# Altium PCB FourKeysKeyboard.PcbDoc
Units mil, origin at the board's own origin, x right, y up, seen from the top; angles counter-clockwise.
Board outline 3569.6 x 1821.05 mil, 2 copper layers (Top Layer, Bottom Layer); 9 components, 5 nets, 72 pads, 88 vias.
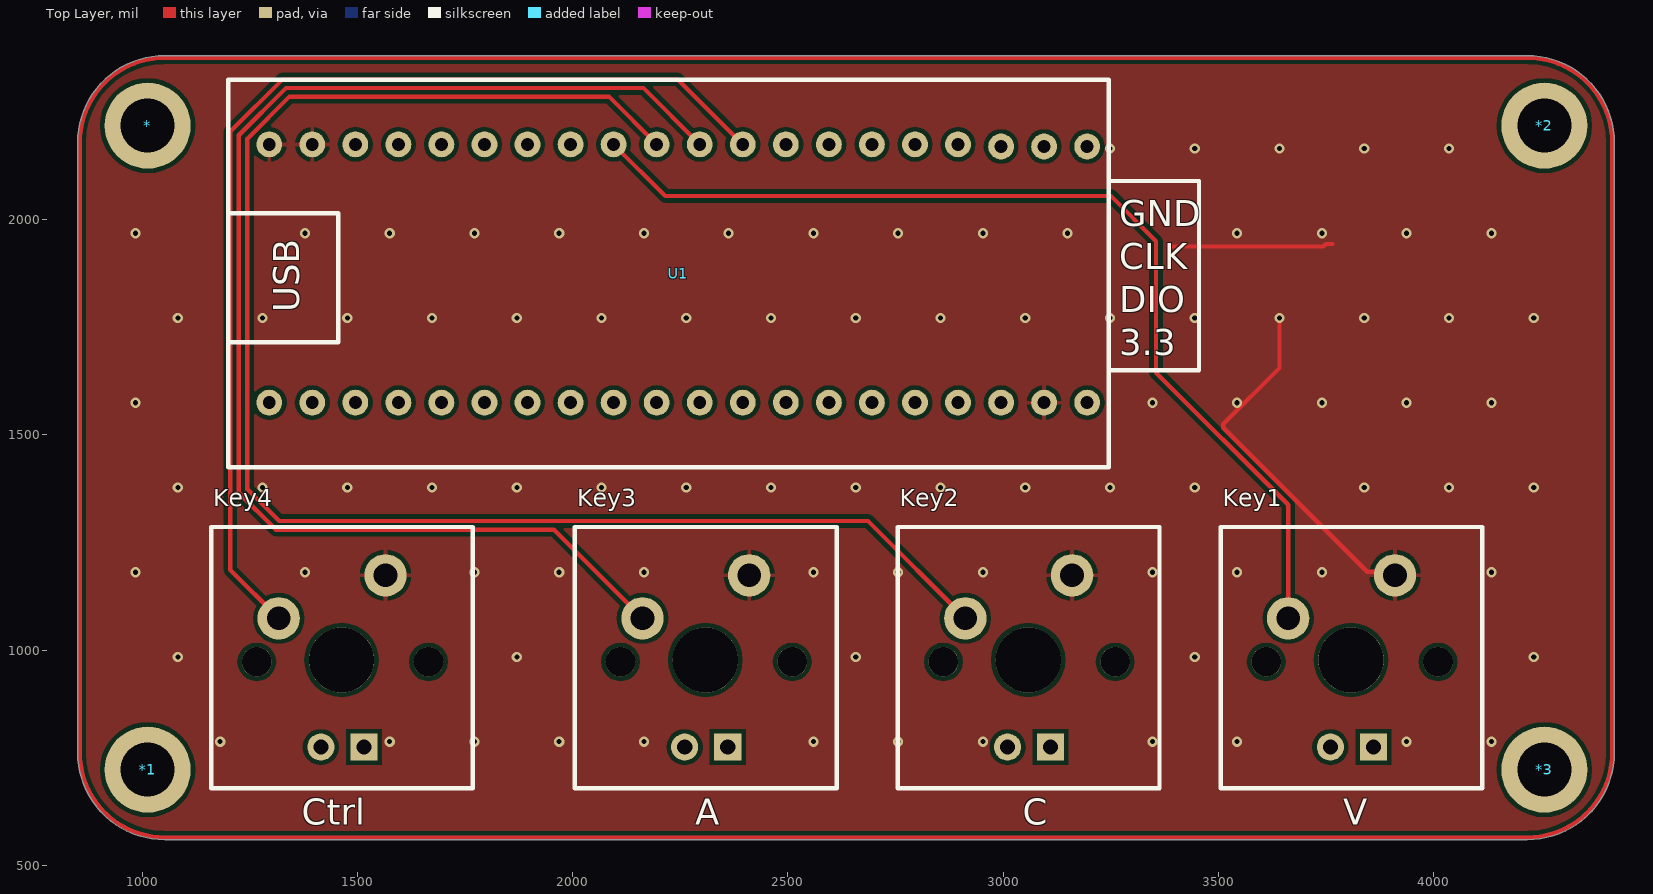
[diagram p0: Top Layer view]
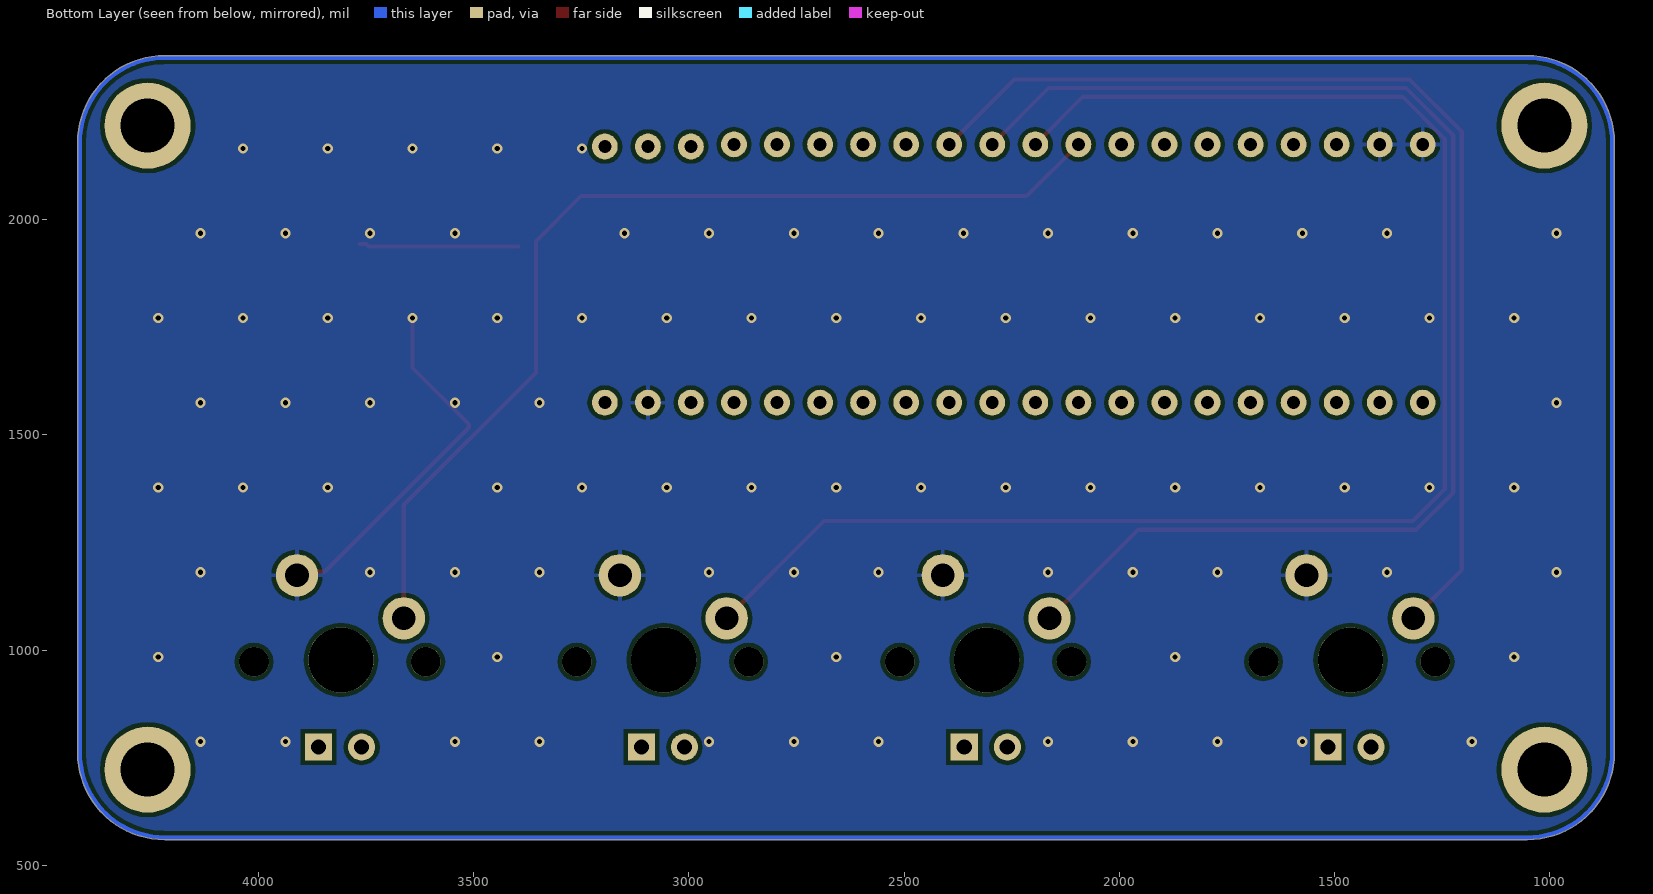
[diagram p1: Bottom Layer view, seen from below]

## Layer stack, top to bottom
Top Solder: solder mask 0.4, Solder Resist, Dk 3.5
Top Layer: signal copper 1.4
Dielectric 1: dielectric 12.6, FR-4, Dk 4.8
Bottom Layer: signal copper 1.4
Bottom Solder: solder mask 0.4, Solder Resist, Dk 3.5

## Board outline
849.99,761.85 849.99,2179.17 849.98,2179.17 cw(c1051.85,2179.17) 1051.85,2381.04 4217.72,2381.04 cw(c4217.72,2179.17) 4419.58,2179.17 4419.58,761.85 cw(c4217.72,761.85) 4217.72,559.99 1051.85,559.99 cw(c1051.85,761.85)

## Design rules (kind name [scope] priority, off if disabled: settings)
Clearance [All] p1: gap=10 ignorepadtopadclearanceinfootprint=FALSE except(0: Arc-Hole Track-Hole SMDPad-Hole THPad-Hole Via-Hole Fill-Hole Poly-Hole Region-Hole Text-Hole)
PolygonConnect [All] p1: connectstyle=Relief reliefconductorwidth=10 reliefentries=4 polygonreliefangle="90 Angle" airgapwidth=10
RoutingVias [All] p1: holewidth=28 width=50 viastyle="Through Hole" minholewidth=28 minwidth=50 maxholewidth=28 maxwidth=50
SolderMaskExpansion [All] p1: expansion=4
Width [All] p1: maxlimit=10 minlimit=10 preferedwidth=10
30 further rules are at their usual default settings.

## Components (designator, comment, footprint, x,y, rotation, side; value= is the part's Value field where it differs from the comment)
* "M3" "M3 125X200" 1012.48,2218.54 r0 top
*1 "M3" "M3 125X200" 1012.48,722.48 r0 top
*2 "M3" "M3 125X200" 4257.09,2218.54 r0 top
*3 "M3" "M3 125X200" 4257.09,722.48 r0 top
Key1 "MX5" "LSW DIP-CHERRY" 3760,775 r0 top
Key2 "MX5" "LSW DIP-CHERRY" 3010,775 r0 top
Key3 "MX5" "LSW DIP-CHERRY" 2260,775 r0 top
Key4 "MX5" "LSW DIP-CHERRY" 1415,775 r0 top
U1 "STM32F103C8T6Module" STM32F103C8T6_Module 2250,1875 r90 top

## Footprints (in the part's own frame and the unit in brackets; to place one, negate y for a bottom-side part, rotate by r counter-clockwise, add the part's x,y. Pads: shape width x height; smd on the part's side, far side on the other; paste and mask are expansions set on the pad)
"LSW DIP-CHERRY" [mm]
  round 2.5 hole 1.4: 1(-2.489,7.595) 2(3.81,10.135)
  round 1.6 hole 0.9: A(0,0)
  rect 1.6x1.6 hole 0.9: K(2.54,0)
  round 1.75 hole 1.75: ""(-3.785,5.029) ""(6.35,5.029)
  round 3.85 hole 3.85: ""(1.219,5.131)
  silkscreen extent -6.48,-2.44 8.97,12.98, body extent -6.58,-2.67 9.02,12.93, height 3.45
"M3 125X200" [mil] "M3螺丝孔，孔125Mil，焊盘200Mil"
  round 200 hole 125: 0(0,0)
STM32F103C8T6_Module [mil] "最常用的32小蓝板"
  round 60 hole 30: 1(-300,955) 2(-300,855) 3(-300,755) 4(-300,655) 5(-300,555) 6(-300,455) 7(-300,355) 8(-300,255) 9(-300,155) 10(-300,55) 11(-300,-45) 12(-300,-145) 13(-300,-245) 14(-300,-345) 15(-300,-445) 16(-300,-545) 17(-300,-645) 18(-300,-745) 19(-300,-845) 20(-300,-945) 21(300,955) 22(300,855) 23(300,755) 24(300,655) 25(300,555) 26(300,455) 27(300,355) 28(300,255) 29(300,155) 30(300,55) 31(300,-45) 32(300,-145) 33(300,-245) 34(300,-345) 35(300,-445) 36(300,-545) 37(300,-645) 38(295,-745) 39(295,-845) 40(295,-945)
  silkscreen extent -450,-1205 450,1050, body extent -450,-1178 450,1088, height 798

## Part data
* *1 *2 *3: "铜柱孔"
Key1 Key2 Key3 Key4: library part Cherry_Key_withLED

## Via types
v1: diameter 23.62, hole 11.81, Top Layer to Bottom Layer, tented both sides, 88 vias

## Nets (pads, with @x,y where several pads share a name; then routed paths per layer and width w, separated by ;. In a path a pad name is that pad's centre, name@x,y a point inside that pad or via, vN(x,y) a via of type N, cw(c..) or ccw(c..) an arc to the next point about the centre after c; other vN are vias at no path point)
GND: Key1.2 Key2.2 Key3.2 Key4.2 U1.19 U1.21 U1.22 | length 1221.8
  Top Layer w10: 3395.48,1937.81 3743.3,1937.81 3749.16,1943.67 3765,1943.67 ; v1(3641.73,1771.65) 3641.73,1655.73 3511.12,1525.12 3511.12,1516.83 3845.79,1182.16 3901.84,1182.16 Key1.2
  other v1: 1181.1,787.4 1574.8,787.4 1771.65,787.4 1968.5,787.4 2165.35,787.4 2559.06,787.4 2755.91,787.4 2952.76,787.4 3346.46,787.4 3543.31,787.4 3937.01,787.4 4133.86,787.4 1082.68,984.25 1870.08,984.25 2657.48,984.25 3444.88,984.25 4232.28,984.25 984.25,1181.1 1377.95,1181.1 1771.65,1181.1 1968.5,1181.1 2165.35,1181.1 2559.06,1181.1 2755.91,1181.1 2952.76,1181.1 3346.46,1181.1 3543.31,1181.1 3740.16,1181.1 4133.86,1181.1 1082.68,1377.95 1279.53,1377.95 1476.38,1377.95 1673.23,1377.95 1870.08,1377.95 2066.93,1377.95 2263.78,1377.95 2460.63,1377.95 2657.48,1377.95 2854.33,1377.95 3051.18,1377.95 3248.03,1377.95 3444.88,1377.95 3838.58,1377.95 4035.43,1377.95 4232.28,1377.95 984.25,1574.8 3346.46,1574.8 3543.31,1574.8 3740.16,1574.8 3937.01,1574.8 4133.86,1574.8 1082.68,1771.65 1279.53,1771.65 1476.38,1771.65 1673.23,1771.65 1870.08,1771.65 2066.93,1771.65 2263.78,1771.65 2460.63,1771.65 2657.48,1771.65 2854.33,1771.65 3051.18,1771.65 3248.03,1771.65 3444.88,1771.65 3838.58,1771.65 4035.43,1771.65 4232.28,1771.65 984.25,1968.5 1377.95,1968.5 1574.8,1968.5 1771.65,1968.5 1968.5,1968.5 2165.35,1968.5 2362.2,1968.5 2559.06,1968.5 2755.91,1968.5 2952.76,1968.5 3149.61,1968.5 3543.31,1968.5 3740.16,1968.5 3937.01,1968.5 4133.86,1968.5 3248.03,2165.35 3444.88,2165.35 3641.73,2165.35 3838.58,2165.35 4035.43,2165.35
NetKey1_1: Key1.1 U1.29 | length 2356.4
  Top Layer w10: U1.29 2215,2055 3250,2055 3355,1950 3355,1644.66 3662,1337.66 Key1.1
NetKey2_1: Key2.1 U1.30 | length 3643.2
  Top Layer w10: U1.30 2084.14,2285.86 1342.22,2285.86 1244.14,2187.78 1244.14,1374.14 1318.28,1300 2686,1300 Key2.1
NetKey3_1: Key3.1 U1.31 | length 3059.5
  Top Layer w10: Key3.1 1956,1280 1310,1280 1224.14,1365.86 1224.14,2196.07 1333.93,2305.86 2164.14,2305.86 U1.31
NetKey4_1: Key4.1 U1.32 | length 2480.8
  Top Layer w10: Key4.1 1204.14,1186.86 1204.14,2204.35 1325.65,2325.86 2244.14,2325.86 U1.32
pads on no net: *1.0 *2.0 *3.0 *.0 Key1. Key1.A Key1.K Key2. Key2.A Key2.K Key3. Key3.A Key3.K Key4. Key4.A Key4.K U1.1 U1.2 U1.3 U1.4 U1.5 U1.6 U1.7 U1.8 U1.9 U1.10 U1.11 U1.12 U1.13 U1.14 U1.15 U1.16 U1.17 U1.18 U1.20 U1.23 U1.24 U1.25 U1.26 U1.27 U1.28 U1.33 U1.34 U1.35 U1.36 U1.37 U1.38 U1.39 U1.40
copper on no net: | length 20806.5
  Top Layer w10: 855,761.85 ccw(c1051.85,761.85) 1051.85,565 1146.85,565 4217.72,565 ccw(c4217.72,761.85) 4414.57,761.85 4414.57,2179.17 ccw(c4217.72,2179.17) 4217.72,2376.02 1146.85,2376.02 1051.85,2376.02 ccw(c1051.85,2179.17) 855,2179.17 855,761.85
  Bottom Layer w10: 855,761.85 ccw(c1051.85,761.85) 1051.85,565 1146.85,565 4217.72,565 ccw(c4217.72,761.85) 4414.57,761.85 4414.57,2179.17 ccw(c4217.72,2179.17) 4217.72,2376.02 1146.85,2376.02 1051.85,2376.02 ccw(c1051.85,2179.17) 855,2179.17 855,761.85

## Polygon pours and split planes (outlines as drawn)
GND on Bottom Layer "GND_L02_P002" (solid, remove dead copper, pour order 2): 645,2760 645,560 4875,560 4875,2760
GND on Top Layer "GND_L01_P000" (solid, remove dead copper, pour order 0): 545,2683.94 545,560 4735,560 4735,2695

## Silkscreen, mask and mechanical layers (free items; w line width, h text height)
Top Overlay:
  text "Ctrl" at 1370,595 h60
  text "A" at 2285,595 h60
  text "C" at 3045,595 h60
  text "V" at 3790,595 h60
Mechanical 1:
  lines w10: 855,761.85 ccw(c1051.85,761.85) 1051.85,565 1146.85,565 4217.72,565 ccw(c4217.72,761.85) 4414.57,761.85 4414.57,2179.17 ccw(c4217.72,2179.17) 4217.72,2376.02 1146.85,2376.02 1051.85,2376.02 ccw(c1051.85,2179.17) 855,2179.17 855,761.85

## Text inside footprints (layer, text, board x,y; h text height)
U1: Top Overlay "3.3" at 3270,1685 h60; Top Overlay "DIO" at 3270,1785 h60; Top Overlay "CLK" at 3270,1885 h60; Top Overlay "GND" at 3270,1985 h60; Top Overlay "USB" at 1365,1785 h60 r90